# Allegro board double_width_fmc.brd
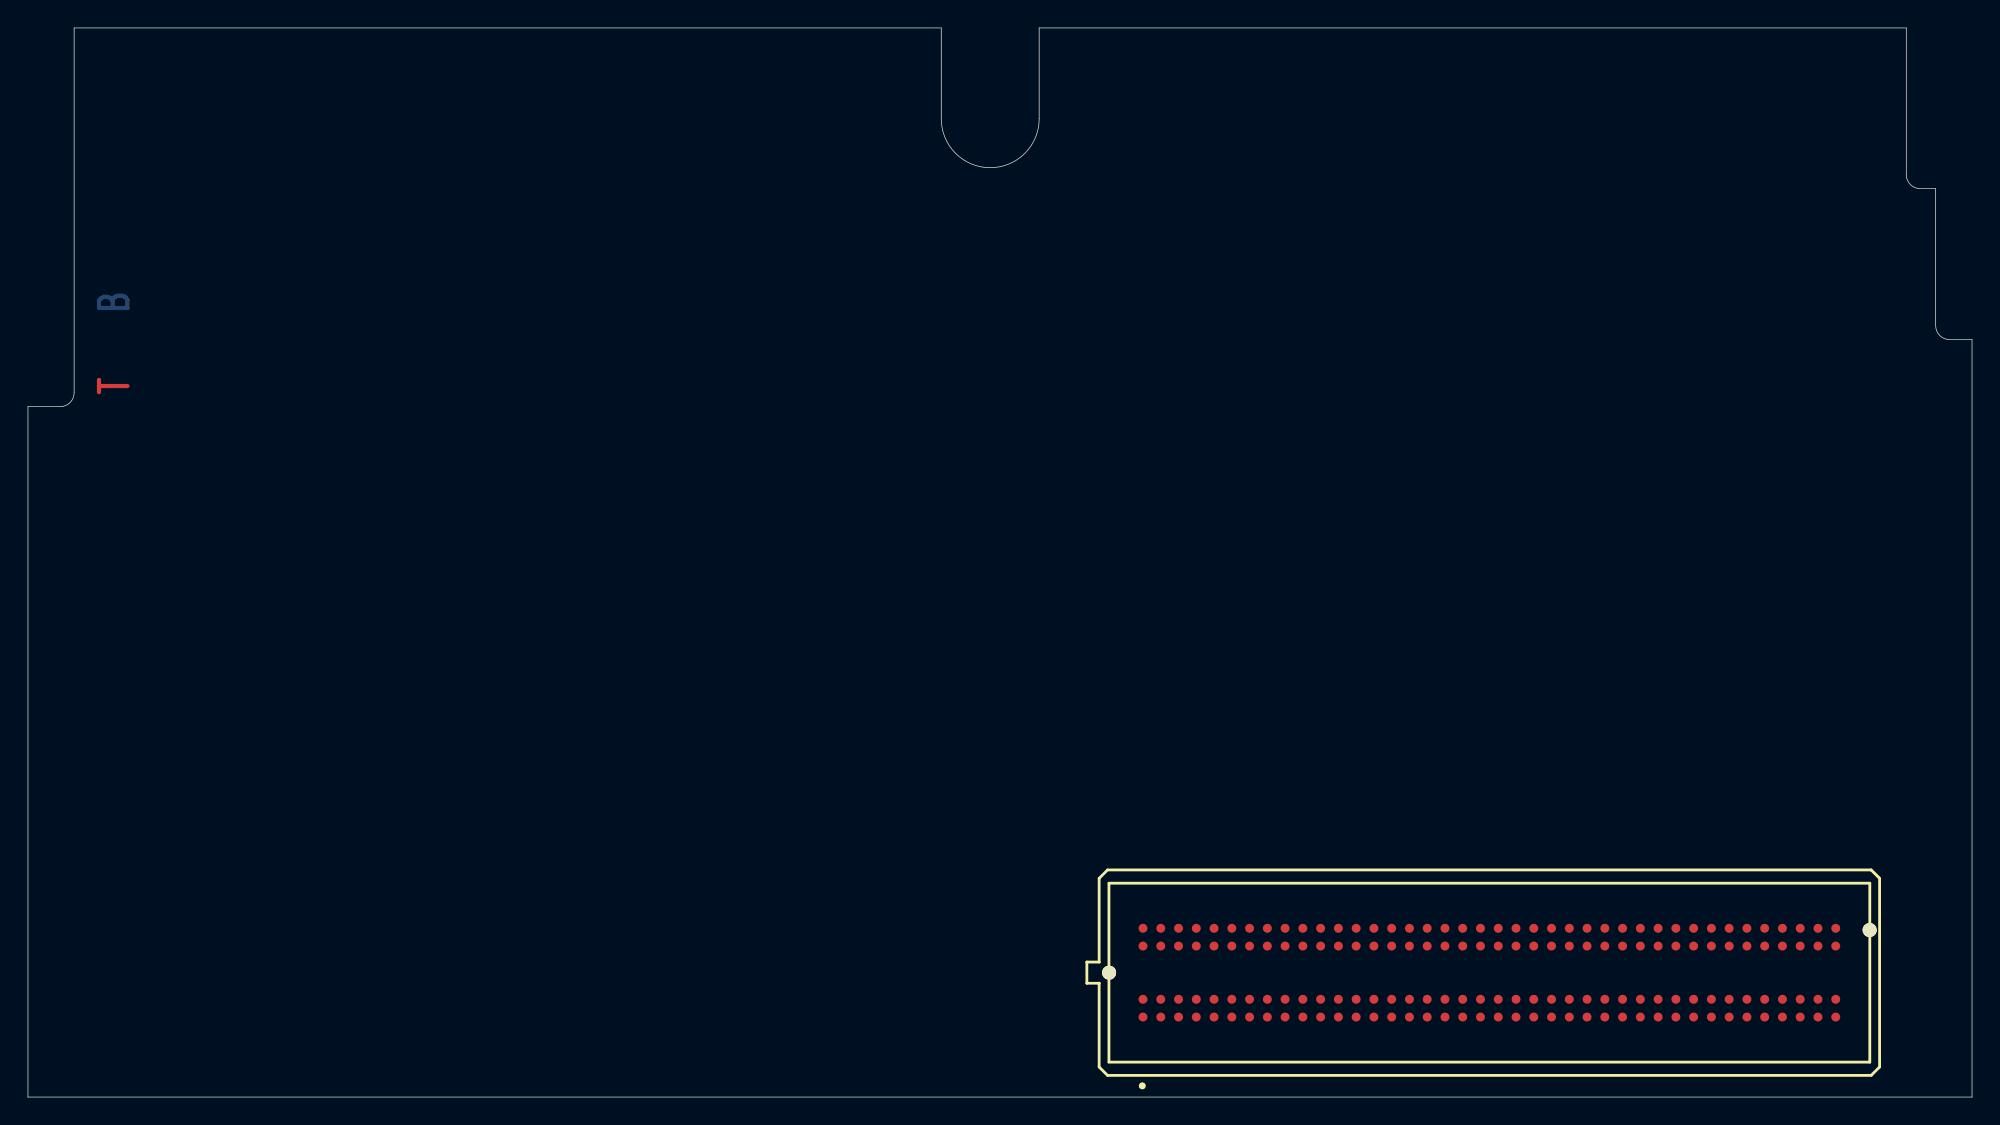
[diagram p0: board, top side]
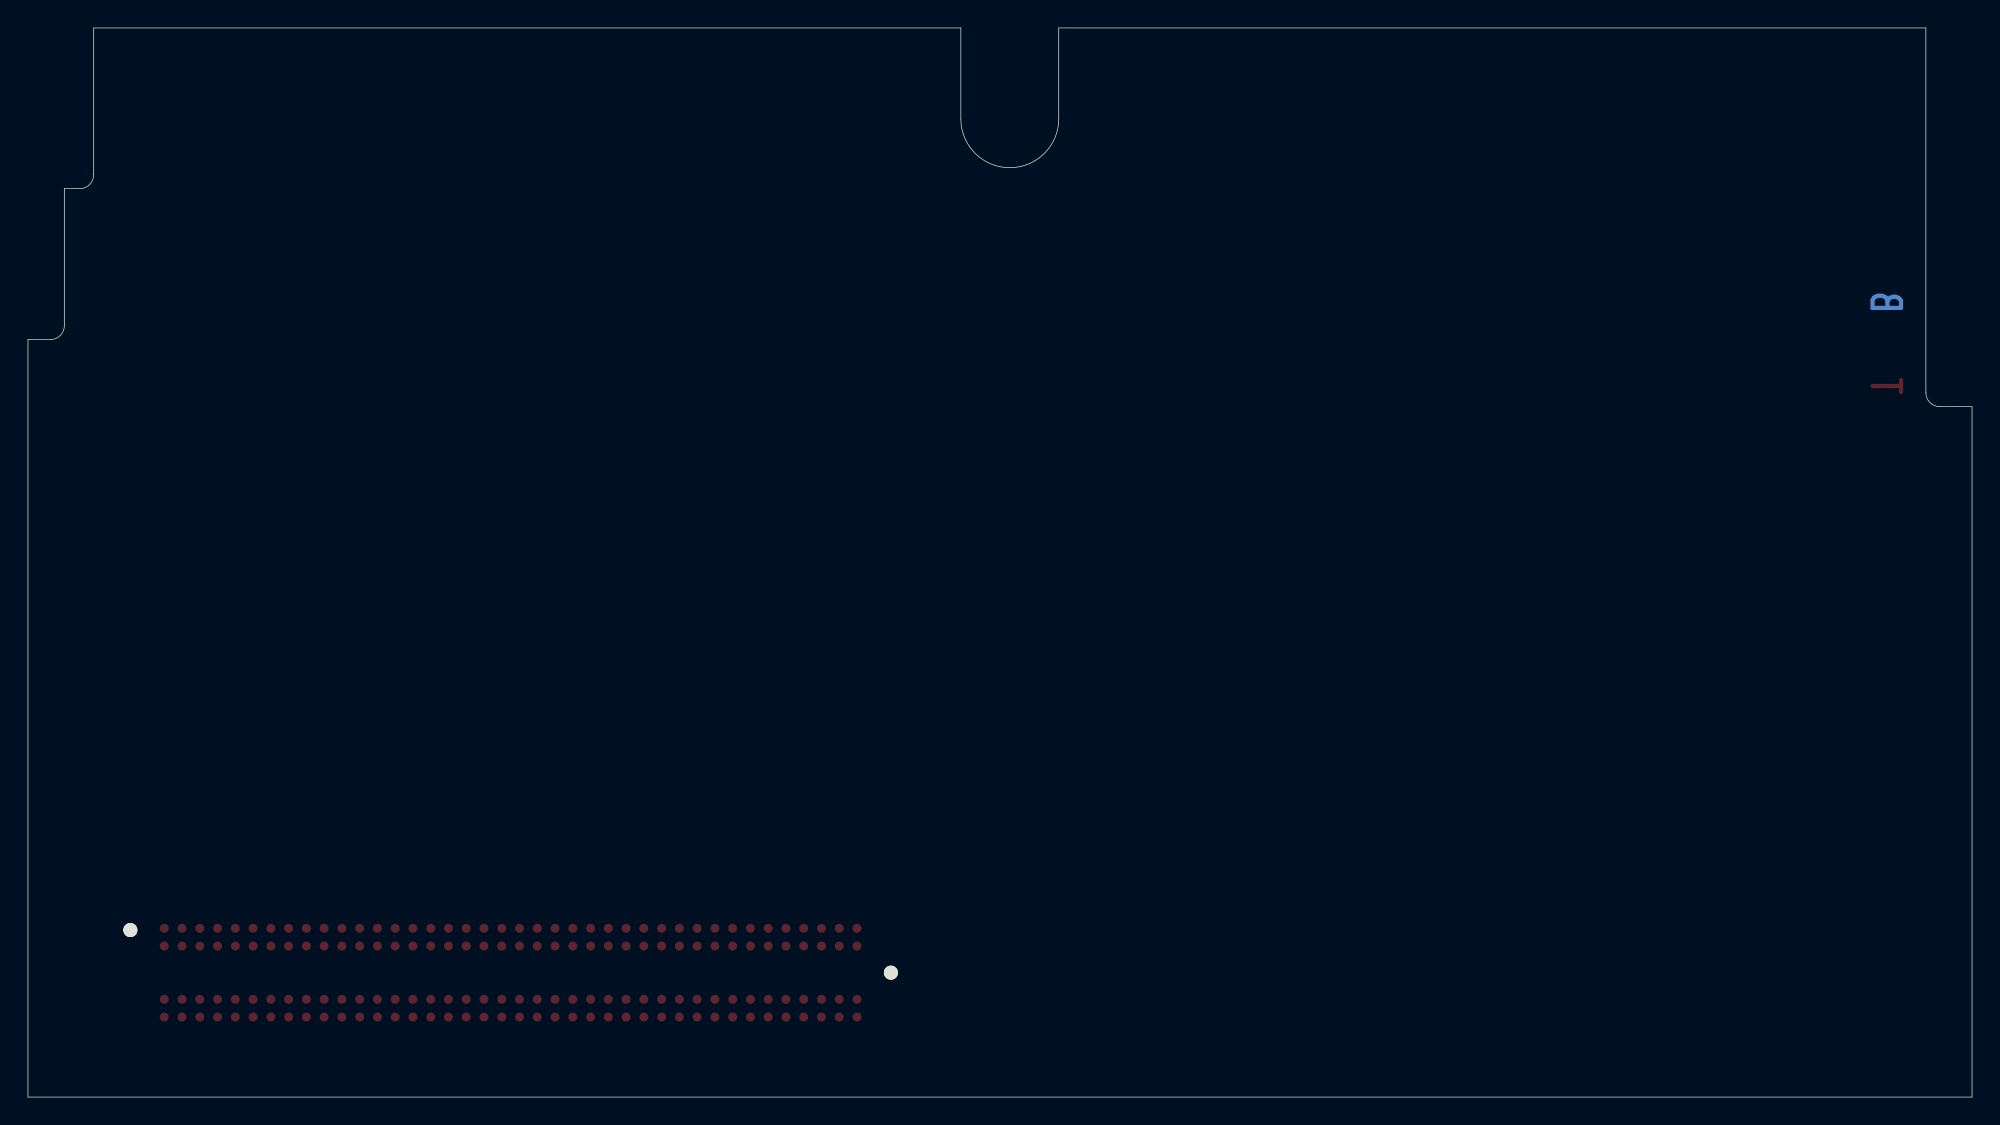
[diagram p1: board, bottom side, seen from below]

Outline 139 x 76.5 mm; copper layers: TOP, L2, L3, L4, L5, BOTTOM. Coordinates in mm from the lower left corner of the outline.
Outline path: 0,49.4 0,0 139,0 139,54.2 137.4,54.2 arc(136.69,54.49) 136.4,55.2 136.4,65 135.3,65 arc(134.59,65.29) 134.3,66 134.3,76.5 72.3,76.5 72.3,70 arc(68.8,66.5) 65.3,70 65.3,76.5 3.3,76.5 3.3,50.4 arc(3.01,49.69) 2.3,49.4 0,49.4

## Design rules (mm)
constraint set DEFAULT: min track width 0.17, pair gap 0.3
net group BEAM_TRIGGER0: nets BEAM_TRIGGER*<0> BEAM_TRIGGER<0>
net group BEAM_TRIGGER1: nets BEAM_TRIGGER*<1> BEAM_TRIGGER<1>
net group BEAM_TRIGGER2: nets BEAM_TRIGGER*<2> BEAM_TRIGGER<2>
net group BEAM_TRIGGER3: nets BEAM_TRIGGER*<3> BEAM_TRIGGER<3>
net group BEAM_TRIGGER_CFD0: nets BEAM_TRIGGER_CFD*<0> BEAM_TRIGGER_CFD<0>
net group BEAM_TRIGGER_CFD2: nets BEAM_TRIGGER_CFD*<2> BEAM_TRIGGER_CFD<2>
net group BEAM_TRIGGER_CFD3: nets BEAM_TRIGGER_CFD*<3> BEAM_TRIGGER_CFD<3>
net group BUSY0: nets TRIG1 TRIG1*
net group BUSY1: nets BUSY1 BUSY1*
net group BUSY2: nets BUSY2 BUSY2*
net group CLK2: nets CLK2 CLK2*
net group CONT0: nets CONT0 CONT0*
net group CONT1: nets CONT1 CONT1*
net group CONT2: nets SPARE1 SPARE1*
net group CTRIG1: nets CTRIG1 CTRIG1*
net group CTRIG2: nets CTRIG2 CTRIG2*
net group DUT_CLK0: nets DUT_CLK0 DUT_CLK0*
net group FRONT_PANEL_CLK: nets FRONT_PANEL_CLK FRONT_PANEL_CLK*
net group SPARE1: nets TRIG0 TRIG0*
net group SPARE2: nets SPARE2 SPARE2*
net group TRIG0: nets BEAM_TRIGGER_CFD*<1> BEAM_TRIGGER_CFD<1>
net group TRIG2: nets TRIG2 TRIG2*
net group FMC_LA: nets BUSY0 CLK1 CONT2 FMC_LA<1> FMC_LA<5> FMC_LA<6> FMC_LA<9> FMC_LA<10> FMC_LA<13> FMC_LA<15> FMC_LA<17> FMC_LA<23> FMC_LA<26> FMC_LA<29> HDMI_POWER_ENABLE1
net group FMC_LA*: nets BUSY0* CLK1* CONT2* FMC_LA*<0> FMC_LA*<1> FMC_LA*<4> FMC_LA*<5> FMC_LA*<6> FMC_LA*<9> FMC_LA*<10> FMC_LA*<13> FMC_LA*<17> FMC_LA*<23> FMC_LA*<26> HDMI_POWER_ENABLE2
net group IN: nets IN<0> IN<1> IN<2> IN<3>
net group VI: nets VIN_FILTERED_6
net group VM1: nets GND_SIGNAL
net group VM2: nets VM2<0>_6
net group VP1: nets VP1<0>_6
net group VTHRESH: nets VTHRESH<0> VTHRESH<1> VTHRESH<2> VTHRESH<3>

## Placement (name value [footprint] x y rotation side)
J4  -  [SAMTEC_ASP-134606-01]  104.49 8.9 180 top

## Library data of the parts
J4 = CON160P_40CDGH: part number: ASP-134606-01

## Footprints (pads in the part's own frame, mm; a bottom-side part is the same pattern mirrored in y, then rotated)
SAMTEC_ASP-134606-01
  round 1.001 hole 1.3 unplated: (-27.19,-3.05) (27.19,0)
  round 0.64 smd: C1(24.765,3.175) C2(23.495,3.175) C3(22.225,3.175) C4(20.955,3.175) C5(19.685,3.175) C6(18.415,3.175) C7(17.145,3.175) C8(15.875,3.175) C9(14.605,3.175) C10(13.335,3.175) C11(12.065,3.175) C12(10.795,3.175) C13(9.525,3.175) C14(8.255,3.175) C15(6.985,3.175) C16(5.715,3.175) C17(4.445,3.175) C18(3.175,3.175) C19(1.905,3.175) C20(0.635,3.175) C21(-0.635,3.175) C22(-1.905,3.175) C23(-3.175,3.175) C24(-4.445,3.175) C25(-5.715,3.175) C26(-6.985,3.175) C27(-8.255,3.175) C28(-9.525,3.175) C29(-10.795,3.175) C30(-12.065,3.175) C31(-13.335,3.175) C32(-14.605,3.175) C33(-15.875,3.175) C34(-17.145,3.175) C35(-18.415,3.175) C36(-19.685,3.175) C37(-20.955,3.175) C38(-22.225,3.175) C39(-23.495,3.175) C40(-24.765,3.175) D1(24.765,1.905) D2(23.495,1.905) D3(22.225,1.905) D4(20.955,1.905) D5(19.685,1.905) D6(18.415,1.905) D7(17.145,1.905) D8(15.875,1.905) D9(14.605,1.905) D10(13.335,1.905) D11(12.065,1.905) D12(10.795,1.905) D13(9.525,1.905) D14(8.255,1.905) D15(6.985,1.905) D16(5.715,1.905) D17(4.445,1.905) D18(3.175,1.905) D19(1.905,1.905) D20(0.635,1.905) D21(-0.635,1.905) D22(-1.905,1.905) D23(-3.175,1.905) D24(-4.445,1.905) D25(-5.715,1.905) D26(-6.985,1.905) D27(-8.255,1.905) D28(-9.525,1.905) D29(-10.795,1.905) D30(-12.065,1.905) D31(-13.335,1.905) D32(-14.605,1.905) D33(-15.875,1.905) D34(-17.145,1.905) D35(-18.415,1.905) D36(-19.685,1.905) D37(-20.955,1.905) D38(-22.225,1.905) D39(-23.495,1.905) D40(-24.765,1.905) G1(24.765,-1.905) G2(23.495,-1.905) G3(22.225,-1.905) G4(20.955,-1.905) G5(19.685,-1.905) G6(18.415,-1.905) G7(17.145,-1.905) G8(15.875,-1.905) G9(14.605,-1.905) G10(13.335,-1.905) G11(12.065,-1.905) G12(10.795,-1.905) G13(9.525,-1.905) G14(8.255,-1.905) G15(6.985,-1.905) G16(5.715,-1.905) G17(4.445,-1.905) G18(3.175,-1.905) G19(1.905,-1.905) G20(0.635,-1.905) G21(-0.635,-1.905) G22(-1.905,-1.905) G23(-3.175,-1.905) G24(-4.445,-1.905) G25(-5.715,-1.905) G26(-6.985,-1.905) G27(-8.255,-1.905) G28(-9.525,-1.905) G29(-10.795,-1.905) G30(-12.065,-1.905) G31(-13.335,-1.905) G32(-14.605,-1.905) G33(-15.875,-1.905) G34(-17.145,-1.905) G35(-18.415,-1.905) G36(-19.685,-1.905) G37(-20.955,-1.905) G38(-22.225,-1.905) G39(-23.495,-1.905) G40(-24.765,-1.905) H1(24.765,-3.175) H2(23.495,-3.175) H3(22.225,-3.175) H4(20.955,-3.175) H5(19.685,-3.175) H6(18.415,-3.175) H7(17.145,-3.175) H8(15.875,-3.175) H9(14.605,-3.175) H10(13.335,-3.175) H11(12.065,-3.175) H12(10.795,-3.175) H13(9.525,-3.175) H14(8.255,-3.175) H15(6.985,-3.175) H16(5.715,-3.175) H17(4.445,-3.175) H18(3.175,-3.175) H19(1.905,-3.175) H20(0.635,-3.175) H21(-0.635,-3.175) H22(-1.905,-3.175) H23(-3.175,-3.175) H24(-4.445,-3.175) H25(-5.715,-3.175) H26(-6.985,-3.175) H27(-8.255,-3.175) H28(-9.525,-3.175) H29(-10.795,-3.175) H30(-12.065,-3.175) H31(-13.335,-3.175) H32(-14.605,-3.175) H33(-15.875,-3.175) H34(-17.145,-3.175) H35(-18.415,-3.175) H36(-19.685,-3.175) H37(-20.955,-3.175) H38(-22.225,-3.175) H39(-23.495,-3.175) H40(-24.765,-3.175)

## Nets
GND_SIGNAL: J4.C1 J4.C4 J4.C5 J4.C8 J4.C9 J4.C12 J4.C13 J4.C16 J4.C17 J4.C20 J4.C21 J4.C24 J4.C25 J4.C28 J4.C29 J4.C32 J4.C33 J4.C36 J4.C38 J4.C40 J4.D2 J4.D3 J4.D6 J4.D7 J4.D10 J4.D13 J4.D16 J4.D19 J4.D22 J4.D25 J4.D28 J4.D37 J4.D39 J4.G1 J4.G4 J4.G5 J4.G8 J4.G11 J4.G14 J4.G17 J4.G20 J4.G23 J4.G26 J4.G29 J4.G32 J4.G35 J4.G38 J4.G40 J4.H3 J4.H6 J4.H9(H<9>) J4.H12 J4.H15 J4.H18 J4.H21 J4.H24 J4.H27 J4.H30 J4.H33 J4.H36 J4.H39
P2V5: J4.G39 J4.H40
P3V3: J4.C39 J4.D32 J4.D36 J4.D38 J4.D40
P12V: J4.C35 J4.C37
BEAM_TRIGGER*<0>: J4.G37
BEAM_TRIGGER*<1>: J4.G34
BEAM_TRIGGER*<2>: J4.G31
BEAM_TRIGGER*<3>: J4.G28
BEAM_TRIGGER<0>: J4.G36
BEAM_TRIGGER<1>: J4.G33
BEAM_TRIGGER<2>: J4.G30
BEAM_TRIGGER<3>: J4.G27
BEAM_TRIGGER_CFD*<0>: J4.H38
BEAM_TRIGGER_CFD*<1>: J4.H35
BEAM_TRIGGER_CFD*<2>: J4.H32
BEAM_TRIGGER_CFD*<3>: J4.H29
BEAM_TRIGGER_CFD<0>: J4.H37
BEAM_TRIGGER_CFD<1>: J4.H34
BEAM_TRIGGER_CFD<2>: J4.H31
BEAM_TRIGGER_CFD<3>: J4.H28
BUSY0: J4.H22
BUSY0*: J4.H23
BUSY1: J4.C18
BUSY1*: J4.C19
BUSY2: J4.G15
BUSY2*: J4.G16
CLK1: J4.C26
CLK1*: J4.C27
CLK2: J4.H7
CLK2*: J4.H8
CONT0: J4.G24
CONT0*: J4.G25
CONT1: J4.C22
CONT1*: J4.C23
CONT2: J4.H13
CONT2*: J4.H14
DP0_C2M: J4.C2
DP0_C2M*: J4.C3
DP0_M2C: J4.C6
DP0_M2C*: J4.C7
DUT_CLK0: J4.H25
DUT_CLK0*: J4.H26
FMC_LA*<0>: J4.G7
FMC_LA*<1>: J4.D9
FMC_LA*<2>: J4.G3
FMC_LA*<4>: J4.H11
FMC_LA*<5>: J4.D12
FMC_LA*<6>: J4.C11
FMC_LA*<9>: J4.D15
FMC_LA*<10>: J4.C15
FMC_LA*<13>: J4.D18
FMC_LA*<17>: J4.D21
FMC_LA*<23>: J4.D24
FMC_LA*<26>: J4.D27
FMC_LA<1>: J4.D8
FMC_LA<2>: J4.G2
FMC_LA<5>: J4.D11
FMC_LA<6>: J4.C10
FMC_LA<9>: J4.D14
FMC_LA<10>: J4.C14
FMC_LA<13>: J4.D17
FMC_LA<15>: J4.H19
FMC_LA<17>: J4.D20
FMC_LA<23>: J4.D23
FMC_LA<26>: J4.D26
FMC_LA<29>: J4.G6
FMC_PRSNT_M2C_L: J4.H2
FMC_PWR_GOOD_FLASH_RST_B: J4.D1
FMC_TCK_BUF: J4.D29
FMC_TDO: J4.D31
FMC_TMS_BUF: J4.D33
FPGA_TDO: J4.D30
FRONT_PANEL_CLK: J4.H4
FRONT_PANEL_CLK*: J4.H5
GA0: J4.C34
GA1: J4.D35
GBTCLK0_M2C: J4.D4
GBTCLK0_M2C*: J4.D5
HDMI_POWER_ENABLE1: J4.H10
HDMI_POWER_ENABLE2: J4.H20
SCL: J4.C30
SDA: J4.C31
SPARE1: J4.G12
SPARE1*: J4.G13
SPARE2: J4.H16
SPARE2*: J4.H17
TRIG0: J4.G21
TRIG0*: J4.G22
TRIG1: J4.G9
TRIG1*: J4.G10
TRIG2: J4.G18
TRIG2*: J4.G19
TRST_L: J4.D34
VREF_A_M2C: J4.H1

## Text on the board
BOTTOM: B
User.Comments: PIN A1 REF. | SECOND CONNECTOR | (OPTIONAL) | PRIMARY CONNECTOR
TOP: T
L2: 2
L3: 3
L4: 4
L5: 5
